# Altium PCB DM6010_R2M2E2.PcbDoc
Units mm, origin at the board's own origin, x right, y up, seen from the top; angles counter-clockwise.
Board outline 23 x 10.05 mm, 4 copper layers (Layer 1, Layer 2, Layer 3, Layer 4), stack 0.972 mm thick; 12 components, 21 nets, 116 pads, 60 vias.
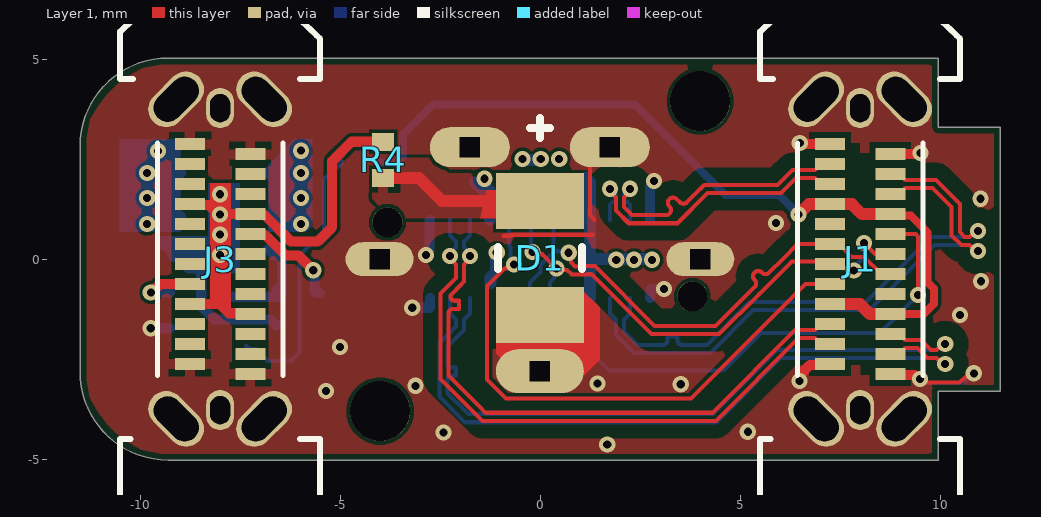
[diagram p0: Layer 1 view]
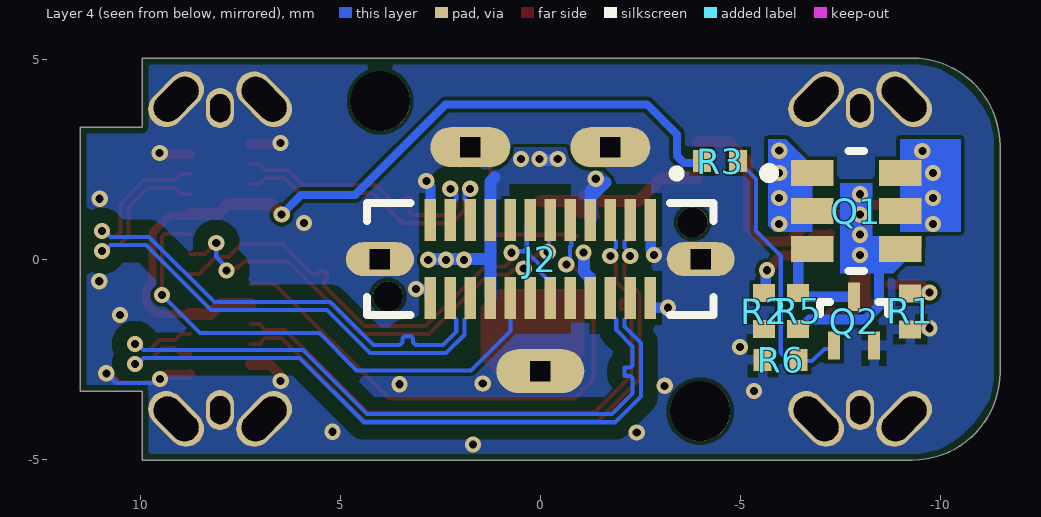
[diagram p1: Layer 4 view, seen from below]
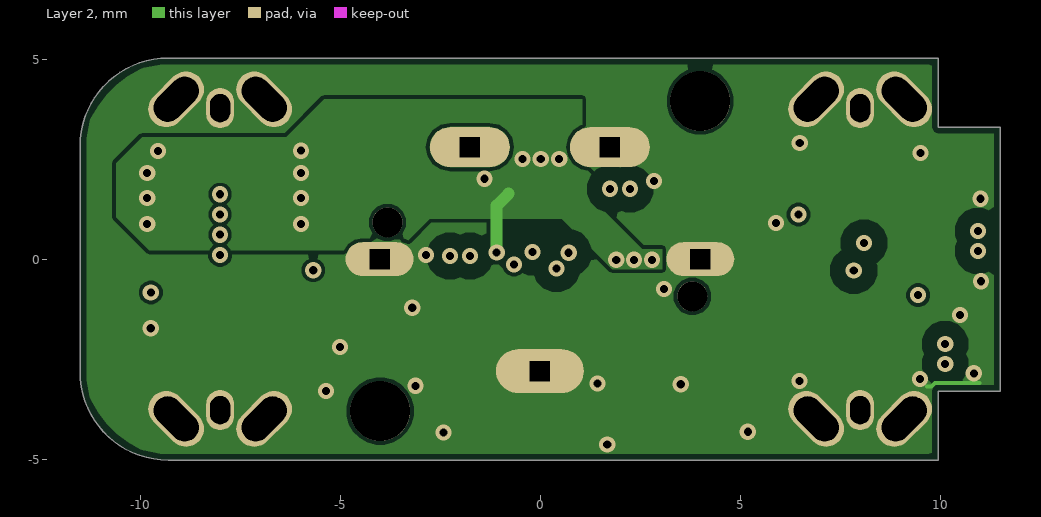
[diagram p2: Layer 2]
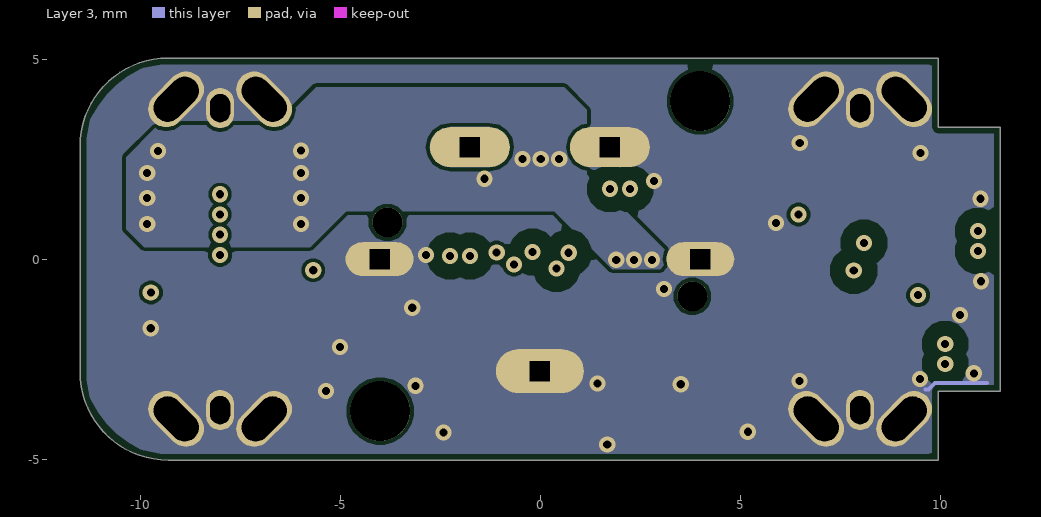
[diagram p3: Layer 3]
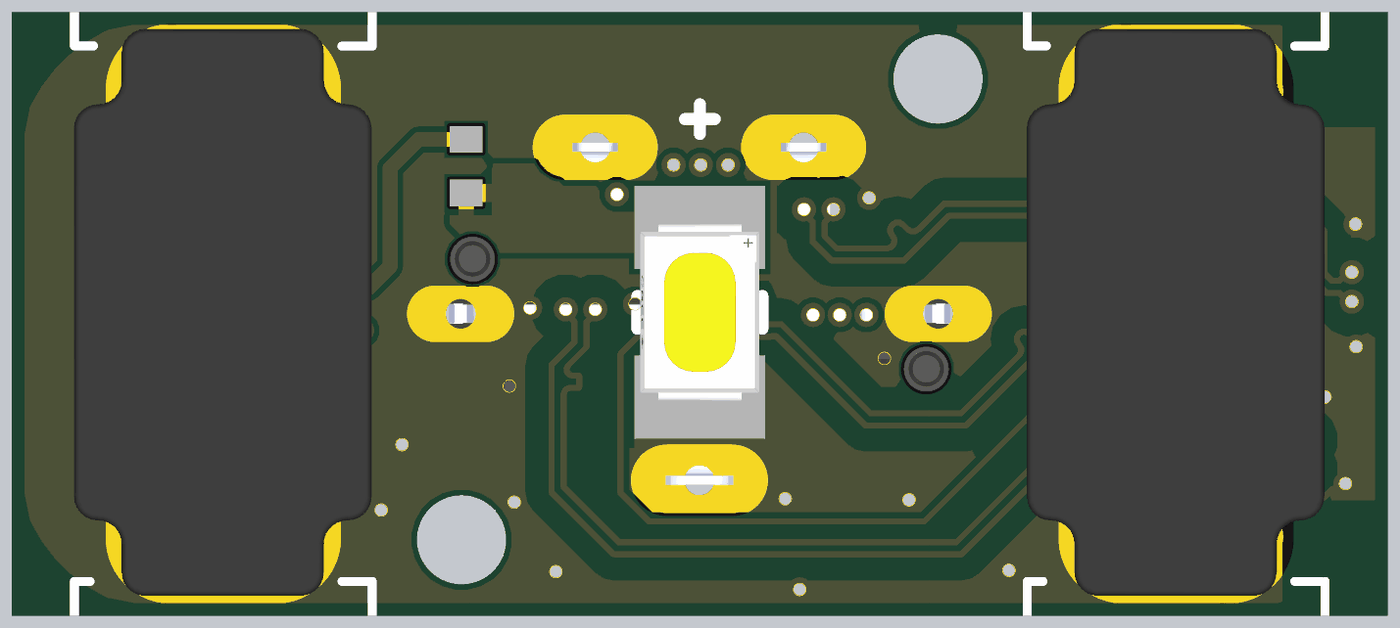
[diagram p4: 3D render of the assembled board from above, using the file's embedded part models]

## Layer stack, top to bottom
Top Solder Mask: solder mask 0.0178, Solder Resist, Dk 3.5
Layer 1: signal copper 0.0356
Dielectric 1: prepreg 0.0711, PP-006, Dk 4
Layer 2: signal copper 0.0279
Dielectric 2: core 0.71, Core-038, Dk 4.3
Layer 3: signal copper 0.0203
Dielectric 3: prepreg 0.0711, PP-006, Dk 4
Layer 4: signal copper 0.0356
Bottom Solder Mask: solder mask 0.0178, Solder Resist, Dk 3.5

## Board outline
-11.5,-2.825 ccw(c-9.3,-2.825) -9.3,-5.025 8.803,-5.025 9.95,-5.025 9.95,-3.3 11.5,-3.3 11.5,3.3 9.95,3.3 9.95,5.025 -9.3,5.025 ccw(c-9.3,2.825) -11.5,2.825

## Design rules (kind name [scope] priority, off if disabled: settings)
AcuteAngle [All] p1: minimum=1.50000000000000E+0001 checktracksonly=TRUE
AssemblyTestPointUsage [All] p1: valid=2
BoardOutlineClearance [not InNet('GND')] p1: gap=0.254 ignorepadtopadclearanceinfootprint=FALSE except(0: Text-OutlineEdge Text-CavityEdge Text-CutoutEdge Text-SplitBarrior Text-SplitContinuation)
BoardOutlineClearance BoardOutlineClearance_GND [All] p2: gap=0.15 ignorepadtopadclearanceinfootprint=FALSE
Clearance diff_pair_gnd [InPolygon vs InAnyDifferentialPair] p1: gap=0.381 ignorepadtopadclearanceinfootprint=FALSE
Clearance [All] p2: gap=0.089 ignorepadtopadclearanceinfootprint=FALSE
Clearance Clearance_default [All] p3: gap=0.102 ignorepadtopadclearanceinfootprint=FALSE
ComponentClearance "BGA Decoupling Clearance" [IsComponent AND OnBottomLayer AND WithinRoom('BGA Decoupling') vs IsComponent AND OnBottomLayer AND WithinRoom('BGA Decoupling')] p1: gap=0 collisioncheckmode=3 verticalgap=0 showdistances=FALSE
ComponentClearance [All] p2: gap=0 collisioncheckmode=3 verticalgap=0 showdistances=TRUE
ComponentOrientations [All] p1: allowedrotations=32
DiffPairsRouting USB [InDifferentialPairClass('USB3')] p1: maxlimit=0.254 minlimit=0.102 mostfreqgap=0.254 toplayer_maxgap=0.127 toplayer_prefgap=0.127 toplayer_minwidth=0.099 toplayer_maxwidth=0.102 toplayer_prefwidth=0.102 bottomlayer_maxgap=0.127 bottomlayer_prefgap=0.127 bottomlayer_minwidth=0.099 bottomlayer_maxwidth=0.102 bottomlayer_prefwidth=0.102 impedanceprofiledriven=TRUE impedanceprofileid={297CAB22-67D0-4EEE-AAEA-9CF56FDF7430} impedanceprofilevalue=90.000000 maxuncoupledlength=12.7
FabricationTestPointUsage [All] p1: valid=2 allowmultiple=FALSE
HoleSize [All] p1: absolutevalues=TRUE maxlimit=25.4 minlimit=0.102 maxpercent=80.000 minpercent=20.000
HoleToHoleClearance [All] p1: gap=0.076 allowstackedmicrovias=TRUE
MatchedLengths "Schematic Matched Net Lengths" [InNetClass('USB')] p1: tolerance=25.4 checknetsindiffpair=TRUE checkdiffpairvsdiffpair=FALSE checkxsignals=FALSE checkothers=FALSE usedelayunits=TRUE delaytolerance=0.500000
MatchedLengths DifferentialPairs [All] p2: tolerance=0.127 checknetsindiffpair=TRUE checkdiffpairvsdiffpair=FALSE checkxsignals=FALSE checkothers=FALSE usedelayunits=TRUE delaytolerance=0.500000
MinimumAnnularRing [All] p1: minimumring=0.076
MinimumSolderMaskSliver [All] p1: minsoldermaskwidth=0.01
NetAntennae [All] p1: netantennaetolerance=0.025
PlaneConnect [All] p1: pad.planeconnectstyle=Relief pad.reliefexpansion=0.508 pad.reliefentries=4 pad.reliefconductorwidth=0.254 pad.reliefairgap=0.254 via.planeconnectstyle=Direct via.reliefexpansion=0.508 via.reliefentries=4 via.reliefconductorwidth=0.254 via.reliefairgap=0.254
PolygonConnect Outer_Layer_PWR [InNetClass('Power_trace')] p1: connectstyle=Direct reliefconductorwidth=0.254 reliefentries=4 polygonreliefangle="90 Angle" airgapwidth=0.254
PolygonConnect GenericPoly [All] p2: thpad.connectstyle=Direct thpad.reliefconductorwidth=0.254 thpad.reliefentries=4 thpad.polygonreliefangle="90 Angle" thpad.airgapwidth=0.254 smdpad.connectstyle=Relief smdpad.reliefconductorwidth=0.254 smdpad.reliefentries=4 smdpad.polygonreliefangle="90 Angle" smdpad.airgapwidth=0.154 via.connectstyle=Direct via.reliefconductorwidth=0.254 via.reliefentries=4 via.polygonreliefangle="90 Angle" via.airgapwidth=0.254
RoutingPriority [InNet('No Net')] p1: routingpriority=0
RoutingVias DiffVias [InDrillLayerPair('Layer 1 - Layer 4')] p1: holewidth=0.711 width=1.27 viastyle="Through Hole" minholewidth=0.711 minwidth=1.27 maxholewidth=0.711 maxwidth=1.27 useviatemplates=TRUE viatemplateguid#1={2571D4BA-F4FB-481A-A40A-0C23688472B6} viatemplatename#1=v41h20m0mx0
RoutingVias DrilledVias [InDrillLayerPair('Layer 1 - Layer 6') OR InDrillLayerPair('Layer 3 - Layer 4')] p2: holewidth=0.203 width=0.406 viastyle="Through Hole" minholewidth=0.203 minwidth=0.406 maxholewidth=25.4 maxwidth=25.4 useviatemplates=TRUE viatemplateguid#1={2571D4BA-F4FB-481A-A40A-0C23688472B6} viatemplatename#1=v41h20m0mx0
SMDToCorner [All] p1: distance=0
SMDToPlane [All] p1: distance=0
SilkToSilkClearance [All] p1: silktosilkclearance=-0.254
SilkToSolderMaskClearance [IsPad] p1: minsilkscreentomaskgap=-5 clearancetoexposedcopper=TRUE
SolderMaskExpansion [All] p1: expansion=0.051 istentingtop=FALSE
UnRoutedNet [All] p1: checkbadconnections=TRUE
ViasUnderSMD [All] p1: allowed=TRUE
Width Width_default [Not IsDifferentialPair] p1: maxlimit=1.27 minlimit=0.102 preferedwidth=0.102
17 further rules are at their usual default settings.

## Classes and differential pairs
net class Power_trace: VBUSOUT VBUSPWR
net class USB: RXB_N RXB_P RXC_N RXC_P TXB_N TXB_P TXC_N TXC_P USB_D_N USB_D_P
differential pair class USB3: RXB RXC TXB TXC USB_D
differential pair USB_D: +USB_D_P -USB_D_N
differential pair TXC: +TXC_P -TXC_N
differential pair TXB: +TXB_P -TXB_N
differential pair RXC: +RXC_P -RXC_N
differential pair RXB: +RXB_P -RXB_N

## Components (designator, comment, footprint, x,y, rotation, side; value= is the part's Value field where it differs from the comment)
D1 "CLM3C-RKW-CUBVAAA3" CLM3C-RKW-CUBVAAA3 0.002,0.025 r270 top
J1 "USB3.1 TYPEC 24P SMD Vertical" CX80B1-24P 8,0 r90 top locked
J2 "USB4151-GF-C" GCT_USB4151-GF-C_REVA -0.005,0 r180 bottom
J3 "USB3.1 TYPEC 24P SMD Vertical" CX80B1-24P -8,0 r90 top
Q1 "IRLTS2242TRPBF" TSOP-6-MFG -7.9,1.2 r180 bottom
Q2 "RE1C002UNTCL" RE1C002UNTCL -7.85,-1.55 r180 bottom
R1 "5.11K 0402" RESC0402(1005)_L -9.252,-1.304 r90 bottom
R2 "5.11K 0402" RESC0402(1005)_L -5.6,-1.3 r90 bottom
R3 "1K 0402" RESC0402(1005)_L -4.5,2.45 r180 bottom
R4 "1K 0402" RESC0402(1005)_L -3.923,2.484 r90 top
R5 "100K 0402" RESC0402(1005)_L -6.45,-1.3 r270 bottom
R6 "100K 0402" RESC0402(1005)_L -6.015,-2.52 r180 bottom

## Footprints (in the part's own frame and the unit in brackets; to place one, negate y for a bottom-side part, rotate by r counter-clockwise, add the part's x,y. Pads: shape width x height; smd on the part's side, far side on the other; paste and mask are expansions set on the pad)
CLM3C-RKW-CUBVAAA3 [mm]
  rect 1.4x2.2 smd paste+0 mask+0: 1(-1.425,0) 2(1.425,0)
  silkscreen extent -3.5,-1.05 0.28,1.05, body extent -2.3,-1.2 2.3,1.2, height 0.25
CX80B1-24P [mm] "USB3.1 Type-C Molex SMT, Through Hole, Vertical"
  rect 0.3x0.75 smd: A1(-2.625,0.755) A2(-2.125,0.755) A3(-1.625,0.755) A4(-1.125,0.755) A5(-0.625,0.755) A6(-0.125,0.755) A7(0.375,0.755) A8(0.875,0.755) A9(1.375,0.755) A10(1.875,0.755) A11(2.375,0.755) A12(2.875,0.755) B1(2.625,-0.755) B2(2.125,-0.755) B3(1.625,-0.755) B4(1.125,-0.755) B5(0.625,-0.755) B6(0.125,-0.755) B7(-0.375,-0.755) B8(-0.875,-0.755) B9(-1.375,-0.755) B10(-1.875,-0.755) B11(-2.375,-0.755) B12(-2.875,-0.755)
  oval 1.6x0.9 hole 0.7 slot 1.3 at 45 deg rot 45: SH1(-3.995,1.1) SH4(3.995,-1.1)
  oval 1.6x0.9 hole 0.7 slot 1.3 at 135 deg rot 135: SH2(3.995,1.1) SH3(-3.995,-1.1)
  oval 1x0.7 hole 0.5 slot 0.7 at 0 deg: SH5(-3.775,0) SH6(3.775,0)
  silkscreen extent -6,-2.5 6,2.5, body extent -4.74,-2.49 4.79,2.51, height 7.17
GCT_USB4151-GF-C_REVA [mm]
  rect 0.28x1.05 smd: A1(2.75,0.975) A2(2.25,0.975) A3(1.75,0.975) A4(1.25,0.975) A5(0.75,0.975) A6(0.25,0.975) A7(-0.25,0.975) A8(-0.75,0.975) A9(-1.25,0.975) A10(-1.75,0.975) A11(-2.25,0.975) A12(-2.75,0.975) B1(-2.75,-0.975) B2(-2.25,-0.975) B3(-1.75,-0.975) B4(-1.25,-0.975) B5(-0.75,-0.975) B6(-0.25,-0.975) B7(0.25,-0.975) B8(0.75,-0.975) B9(1.25,-0.975) B10(1.75,-0.975) B11(2.25,-0.975) B12(2.75,-0.975)
  oval 1.7x0.85 hole 0.5 square: S1(-4.01,0) S4(4.01,0)
  oval 2x1 hole 0.5 square: S2(-1.75,2.8) S3(1.75,2.8)
  oval 2.2x1.1 hole 0.5 square: S5(0,-2.8)
  round 0.75 hole 0.75 unplated: ""(-3.81,-0.93) ""(3.81,0.92)
  silkscreen extent -4.33,-1.4 4.33,2.24, body extent -4.33,-2.88 4.33,2.88, height 11.1
RE1C002UNTCL [mm] "ROHM SOT-416FL"
  rect 0.3x0.71 smd: 1(-0.5,-0.61) 2(0.5,-0.61) 3(0,0.61)
  silkscreen extent -0.85,0.18 0.85,0.48, body extent -0.8,-0.8 0.8,0.8, height 0.75
RESC0402(1005)_L [mm] "Chip Resistor, Body 1.0x0.5mm, IPC High Density"
  rect 0.45x0.55 smd: 1(-0.45,0) 2(0.45,0)
  body extent -0.52,-0.27 0.53,0.28, height 0.4
TSOP-6-MFG [mm]
  rect 1.06x0.65 smd: 1(-1.1,0.95) 2(-1.1,0) 3(-1.1,-0.95) 4(1.1,-0.95) 5(1.1,0) 6(1.1,0.95)
  silkscreen extent -2.3,-1.5 0.2,1.5, body extent -1.4,-1.45 1.4,1.45, height 1.45

## Part data
D1: "Single Color LED, Red", Color=Red, Forward Current-Max=50mA, Manufacturer 1=Cree, Max Operating Temperature=100°C, Min Operating Temperature=-40°C, Additional Feature="HIGH RELIABILITY", Category=LEDs, ComponentLink1Description=https://datasheet.ciiva.com:443/pdfs/VipMasterIC/IC/CREE/CREE-S-A0009778054/CREE-S-A0009831191-1.pdf?src-supplier=IHS+Markit, ComponentLink1URL=https://datasheet.ciiva.com:443/pdfs/VipMasterIC/IC/CREE/CREE-S-A0009778054/CREE-S-A0009831191-1.pdf?src-supplier=IHS+Markit, ComponentLink2Description=https://datasheet.ciiva.com/15210/getdatasheetpartid-563038-15210357.pdf?src-supplier=Verical, ComponentLink2URL=https://datasheet.ciiva.com/15210/getdatasheetpartid-563038-15210357.pdf?src-supplier=Verical, ComponentLink3Description=https://datasheet.ciiva.com/2116/clm3crkwakw1156-2116358.pdf?src-supplier=Digi-Key, ComponentLink3URL=https://datasheet.ciiva.com/2116/clm3crkwakw1156-2116358.pdf?src-supplier=Digi-Key, Luminous Intensity-Nom=730mcd, Manufacturer Part Number 1=CLM3C-RKW-CUBVAAA3, Mount="Surface Mount", Number of Functions=1, Number of Pins=2, Optoelectronic Device Type="SINGLE COLOR LED", Overall Height=1.3mm, Packaging="Tape and Reel", Pricing 1="1=0,16910, 10=0,15700, 25=0,15600, 3000=0,11060, 6000=0,10380, 9000=0,10200 (USD)", REACH SVHC="No SVHC", RoHS=Yes, RoHS Compliant=Yes, Shape=Rectangular, Stock 1=46, Supplier 1="Arrow Electronics", Supplier Part Number 1=CLM3C-RKW-CUBVAAA3, Viewing Angle=120°
J1 J3: library part CX80B1-24P, "CONN RCPT USB3.1 TYPEC 24POS SMD Vertical", Case/Package=0101, Current Rating=1.25A, Flammability Rating="UL94 V-0", Insulation Color=Black, Manufacturer 1="Hirose Electric Co Ltd", Max Operating Temperature=80°C, Min Operating Temperature=-30°C, Supplier Part Number 1=26-CX80B1-24PCT-ND, ComponentLink1Description="Product page", ComponentLink1URL=https://www.jae.com/en/connectors/series/detail/product/id=66513, ComponentLink2Description=Digikey, ComponentLink2URL=https://www.digikey.com/en/products/detail/jae-electronics/DX07S024WJ3R400/6594044, Connector Type=USB, Contact Material="Copper Alloy", Contact Plating=Gold, Features=Shielded, Gender=Receptacle, Housing Material=Thermoplastic, Length=8.94mm, Manufacturer Part Number 1=CX80B1-24P, Mating Cycles=10000, Mount="Surface Mount,Through Hole,Vertical", Number of Contacts=24, Number of Pins=24, Number of Ports=1, Number of Terminals=24, Orientation=Vertical, Packaging="Tape and Reel", Pitch=0.5mm, Pricing 1="1=2.15000, 10=1.94900, 25=1.82960, 50=1.75000, 100=1.67050, 250=1.51140, 500=1.39208 (USD)", REACH SVHC=Unknown, RoHS=Yes, Shielding=Shielded, Stock 1=939, Supplier 1=Digi-Key, Termination=Solder, USB Standard="USB 3.1"
J2: "USB Connector, 24 Contact(s), Male, Straight, Surface Mount Terminal, Locking, Plug", Manufacturer 1="Global Connector Technology", Supplier Part Number 1=86AH2023, Manufacturer Part Number 1=USB4151-GF-C, Pricing 1="1=1,89000, 10=1,74000, 25=1,62000, 50=1,50000, 100=1,35000, 250=1,20000 (USD)", RoHS=Yes, Stock 1=1006, Supplier 1=Newark
Q1: "MOSFET P-CH 20V 6.9A 6TSOP", Case/Package=TSOP, Continuous Drain Current (ID)=6.9A, Drain to Source Voltage (Vdss)=-20V, Gate to Source Voltage (Vgs)=12V, Input Capacitance=905pF, Manufacturer 1=Infineon, Max Operating Temperature=150°C, Max Power Dissipation=2W, Min Operating Temperature=-55°C, Threshold Voltage=-400mV, Contact Plating=Tin, Halogen Free="Halogen Free", Lead Free="Lead Free", Manufacturer Part Number 1=IRLTS2242TRPBF, Max Dual Supply Voltage=-20V, Mount="Surface Mount", Number of Pins=6, Packaging="Tape and Reel", Rds On Max=32mR, REACH SVHC="No SVHC", Rise Time=18ns, RoHS Compliant=Yes
Q2: "VISHAY - SI1062X-T1-GE3 - MOSFET Transistor, N Channel, 530 mA, 20 V, 0.35 ohm, 4.5 V, 1 V", Case/Package=SOT-89, Continuous Drain Current (ID)=200mA, Drain to Source Breakdown Voltage=20V, Drain to Source Resistance=350mR, Drain-source On Resistance-Max=420mR, Gate to Source Voltage (Vgs)=8V, Input Capacitance=25pF, Manufacturer 1=Rohm, Manufacturer 2="Vishay Siliconix", Manufacturer Part Number 2=SI1062X-T1-GE3, Max Operating Temperature=150°C, Max Power Dissipation=150mW, Min Operating Temperature=-55°C, Package Quantity=3000, Power Dissipation=220mW, Supplier Part Number 1=RE1C002UNTCLCT-ND, Threshold Voltage=1V, Category=MOSFETs, ComponentLink1Description=http://www.mouser.com/ds/2/348/re1c002untcl-e-1018231.pdf?src-supplier=Mouser, ComponentLink1URL=http://www.mouser.com/ds/2/348/re1c002untcl-e-1018231.pdf?src-supplier=Mouser, ComponentLink2Description=http://rohmfs.rohm.com/en/techdata_basic/transistor/taping/EMT3_TL_taping.pdf?src-supplier=Digi-Key, ComponentLink2URL=http://rohmfs.rohm.com/en/techdata_basic/transistor/taping/EMT3_TL_taping.pdf?src-supplier=Digi-Key, ComponentLink3Description=http://rohmfs.rohm.com/en/products/databook/datasheet/discrete/transistor/mosfet/re1c002un.pdf?src-supplier=Avnet, ComponentLink3URL=http://rohmfs.rohm.com/en/products/databook/datasheet/discrete/transistor/mosfet/re1c002un.pdf?src-supplier=Avnet, ComponentLink4Description=https://www.rohm.com/datasheet/RE1C002UN/re1c002untcl-e?src-supplier=Digi-Key, ComponentLink4URL=https://www.rohm.com/datasheet/RE1C002UN/re1c002untcl-e?src-supplier=Digi-Key, ComponentLink5Description=http://www.farnell.com/datasheets/2704376.pdf?src-supplier=Newark, ComponentLink5URL=http://www.farnell.com/datasheets/2704376.pdf?src-supplier=Newark, ComponentLink6Description=http://www.farnell.com/datasheets/2704376.pdf?src-supplier=Farnell, ComponentLink6URL=http://www.farnell.com/datasheets/2704376.pdf?src-supplier=Farnell, ComponentLink7Description=http://www.farnell.com/datasheets/2704376.pdf?src-supplier=Element14, ComponentLink7URL=http://www.farnell.com/datasheets/2704376.pdf?src-supplier=Element14, ComponentLink8Description=https://datasheet.ciiva.com/6376/si1062x-6376310.pdf?src-supplier=Digi-Key, ComponentLink8URL=https://datasheet.ciiva.com/6376/si1062x-6376310.pdf?src-supplier=Digi-Key, ComponentLink9Description=https://datasheet.ciiva.com/24011/si1062x-256537-24011195.pdf?src-supplier=Mouser, ComponentLink9URL=https://datasheet.ciiva.com/24011/si1062x-256537-24011195.pdf?src-supplier=Mouser, ComponentLink10Description=https://datasheet.ciiva.com/6376/si1062x-6376251.pdf?src-supplier=Digi-Key, ComponentLink10URL=https://datasheet.ciiva.com/6376/si1062x-6376251.pdf?src-supplier=Digi-Key, Drain to Source Voltage (Vdss)=20V, Element Configuration=Single, Fall Time=11ns, Lead Free="Lead Free", Manufacturer Part Number 1=RE1C002UNTCL, Mount="Surface Mount", Number of Channels=1, Number of Elements=1, Number of Pins=3, On-State Resistance=420mR, Packaging="Tape and Reel", Polarity=N-CHANNEL, Pricing 1="1=0.20000, 10=0.18200, 100=0.09930, 500=0.06112, 1000=0.04167 (USD)", Pricing 2="1=0,47000, 10=0,33100, 25=0,30800, 100=0,16720, 500=0,13640, 1000=0,10120 (USD)", Rds On Max=1.2R, REACH SVHC="No SVHC", Rise Time=14ns, RoHS=Yes, RoHS Compliant=Yes, Series=TrenchFET®, Stock 1=868886, Stock 2=28076, Supplier 1=Digi-Key, Supplier 2=Digi-Key, Supplier 3=Digi-Key, Supplier Part Number 2=SI1062X-T1-GE3CT-ND, Supplier Part Number 3=SI1062X-T1-GE3TR-ND, Turn-Off Delay Time=16ns, Turn-On Delay Time=2ns, Weight=0.001058oz
R1 R2: library part RC0402FR-075K11L, "RES SMD 5.11K OHM 1% 1/16W 0402 5.11 kOhms ±1% 0.063W, 1/16W Chip Resistor 0402 (1005 Metric) Moisture Resistant Thick Film", Case Code (Imperial)=0402, Case Code (Metric)=1005, Manufacturer 1=Yageo, Max Operating Temperature=155°C, Max Power Dissipation=63mW, Min Operating Temperature=-55°C, Package Quantity=1, Power Rating=62.5mW, Resistance=5.11kR, Supplier Part Number 1=311-5.11KLRCT-ND, Temperature Coefficient=100ppm/°C, Tolerance=1%, Voltage Rating=50V, Case/Package=0402, ComponentLink1Description=https://datasheet.ciiva.com/2518/pyu-r-int-thick-7-2518982.pdf?src-supplier=Digi-Key, ComponentLink1URL=https://datasheet.ciiva.com/2518/pyu-r-int-thick-7-2518982.pdf?src-supplier=Digi-Key, ComponentLink2Description=https://datasheet.ciiva.com/2518/pyu-r-int-thick-7-2518983.pdf?src-supplier=Digi-Key, ComponentLink2URL=https://datasheet.ciiva.com/2518/pyu-r-int-thick-7-2518983.pdf?src-supplier=Digi-Key, ComponentLink3Description=https://datasheet.ciiva.com/5684/1018594-5684622.pdf?src-supplier=Farnell, ComponentLink3URL=https://datasheet.ciiva.com/5684/1018594-5684622.pdf?src-supplier=Farnell, ComponentLink4Description=https://datasheet.ciiva.com/16743/pyu-rc0402-51-rohs-l-6-r-16743871.pdf?src-supplier=Future+Electronics, ComponentLink4URL=https://datasheet.ciiva.com/16743/pyu-rc0402-51-rohs-l-6-r-16743871.pdf?src-supplier=Future+Electronics, Composition="Thick Film", Depth=0.5mm, Features="Moisture Resistant", Height=0.016inch, Lead Free="Lead Free", Length=1mm, Manufacturer Part Number 1=RC0402FR-075K11L, Military Standard=Not, Number of Terminations=2, Packaging="Tape and Reel", Pricing 1="1=0.10000, 10=0.01600, 100=0.00670, 1000=0.00301, 2500=0.00261, 5000=0.00215 (USD)", RoHS=Yes, Stock 1=1263456, Supplier 1=Digi-Key, Termination=SMD/SMT, Voltage Rating (DC)=50V, Width=0.02inch, Working Voltage=50V
R3 R4: library part RC0402FR-071KL, "RES SMD 1K OHM 1% 1/16W 0402 1 kOhms ±1% 0.063W, 1/16W Chip Resistor 0402 (1005 Metric) Moisture Resistant Thick Film", Case Code (Imperial)=0402, Case Code (Metric)=1005, Manufacturer 1=Yageo, Max Operating Temperature=155°C, Min Operating Temperature=-55°C, Power Rating=62.5mW, Resistance=1kR, Supplier Part Number 1=311-1.00KLRCT-ND, Temperature Coefficient=100ppm/°C, Tolerance=1%, Voltage Rating=50V, Case/Package=0402, ComponentLink1Description=https://datasheet.ciiva.com/11819/0900766b80c66297-11819477.pdf?src-supplier=RSComponents, ComponentLink1URL=https://datasheet.ciiva.com/11819/0900766b80c66297-11819477.pdf?src-supplier=RSComponents, ComponentLink2Description=https://datasheet.ciiva.com/12666/pyu-rc0402-51-rohs-l-6-r-12666741.pdf?src-supplier=Mouser, ComponentLink2URL=https://datasheet.ciiva.com/12666/pyu-rc0402-51-rohs-l-6-r-12666741.pdf?src-supplier=Mouser, ComponentLink3Description=https://datasheet.ciiva.com/17063/pyu-rc0402-51-rohs-l-6-r-17063193.pdf?src-supplier=Future+Electronics, ComponentLink3URL=https://datasheet.ciiva.com/17063/pyu-rc0402-51-rohs-l-6-r-17063193.pdf?src-supplier=Future+Electronics, ComponentLink4Description=https://datasheet.ciiva.com/22747/1018594-22747513.pdf?src-supplier=Element14, ComponentLink4URL=https://datasheet.ciiva.com/22747/1018594-22747513.pdf?src-supplier=Element14, ComponentLink5Description=https://datasheet.ciiva.com/7849/1018594-7849869.pdf?src-supplier=Element14, ComponentLink5URL=https://datasheet.ciiva.com/7849/1018594-7849869.pdf?src-supplier=Element14, ComponentLink6Description=https://datasheet.ciiva.com/7983/1018594-7983502.pdf?src-supplier=Element14, ComponentLink6URL=https://datasheet.ciiva.com/7983/1018594-7983502.pdf?src-supplier=Element14, ComponentLink7Description=https://datasheet.ciiva.com/7849/1018594-7849871.pdf?src-supplier=Element14, ComponentLink7URL=https://datasheet.ciiva.com/7849/1018594-7849871.pdf?src-supplier=Element14, Composition="Thick Film", Depth=0.5mm, Height=0.32mm, Lead Free="Lead Free", Length=1mm, Manufacturer Part Number 1=RC0402FR-071KL, Military Standard=Not, Number of Pins=2, Packaging="Tape and Reel", Pricing 1="1=0.10000, 10=0.01600, 100=0.00670, 1000=0.00301, 2500=0.00261, 5000=0.00215 (USD)", REACH SVHC=Unknown, RoHS=Yes, Stock 1=60695854, Supplier 1=Digi-Key, Termination=SMD/SMT, Voltage Rating (DC)=50V, Width=0.5mm
R5 R6: library part RC0402FR-07100KL, "RES SMD 100K OHM 1% 1/16W 0402", Case Code (Imperial)=0402, Case Code (Metric)=1005, Manufacturer 1=Yageo, Max Operating Temperature=155°C, Max Power Dissipation=63mW, Min Operating Temperature=-55°C, Package Quantity=1, Resistance=100kR, Supplier Part Number 1=311-100KLRCT-ND, Temperature Coefficient=100ppm/°C, Tolerance=1%, Voltage Rating=50V, Case/Package=0402, ComponentLink1Description=https://datasheet.ciiva.com/11819/0900766b80c66297-11819452.pdf?src-supplier=RSComponents, ComponentLink1URL=https://datasheet.ciiva.com/11819/0900766b80c66297-11819452.pdf?src-supplier=RSComponents, ComponentLink2Description=https://datasheet.ciiva.com/2453/pyu-r-int-thick-7-2453361.pdf?src-supplier=Digi-Key, ComponentLink2URL=https://datasheet.ciiva.com/2453/pyu-r-int-thick-7-2453361.pdf?src-supplier=Digi-Key, ComponentLink3Description=https://datasheet.ciiva.com/2453/pyu-r-int-thick-7-2453362.pdf?src-supplier=Digi-Key, ComponentLink3URL=https://datasheet.ciiva.com/2453/pyu-r-int-thick-7-2453362.pdf?src-supplier=Digi-Key, ComponentLink4Description=https://datasheet.ciiva.com/2453/pyu-r-int-thick-7-2453363.pdf?src-supplier=Digi-Key, ComponentLink4URL=https://datasheet.ciiva.com/2453/pyu-r-int-thick-7-2453363.pdf?src-supplier=Digi-Key, ComponentLink5Description=https://datasheet.ciiva.com/22747/1018594-22747509.pdf?src-supplier=Element14, ComponentLink5URL=https://datasheet.ciiva.com/22747/1018594-22747509.pdf?src-supplier=Element14, ComponentLink6Description=https://datasheet.ciiva.com/15189/getdatasheetpartid-323696-15189334.pdf?src-supplier=Verical, ComponentLink6URL=https://datasheet.ciiva.com/15189/getdatasheetpartid-323696-15189334.pdf?src-supplier=Verical, ComponentLink7Description=https://datasheet.ciiva.com/12667/pyu-rc0402-51-rohs-l-6-r-12667930.pdf?src-supplier=Mouser, ComponentLink7URL=https://datasheet.ciiva.com/12667/pyu-rc0402-51-rohs-l-6-r-12667930.pdf?src-supplier=Mouser, Composition="Thick Film", Depth=0.5mm, Features="Moisture Resistant", Height=0.016inch, Lead Free="Lead Free", Length=0.039inch, Manufacturer Part Number 1=RC0402FR-07100KL, Military Standard=Not, Number of Terminations=2, Packaging="Tape and Reel", Power Rating=63mW, Pricing 1="1=0.10000, 10=0.01500, 100=0.00600, 1000=0.00270, 2500=0.00235, 5000=0.00194 (USD)", REACH SVHC="No SVHC", RoHS=Yes, Stock 1=50867324, Supplier 1=Digi-Key, Supplier 2=Newark, Supplier 3=Mouser, Supplier Part Number 2=67R9887, Supplier Part Number 3=603-RC0402FR-07100KL, Termination=SMD/SMT, Width=0.02inch, Working Voltage=50V

## Free pads (board coordinates)
  round 1.5 hole 1.5 unplated paste-2 mask-2: A(-4,-3.8) A(4,3.95)

## Via types
v1: diameter 0.406, hole 0.203, Layer 1 to Layer 4, tented both sides, 60 vias

## Nets (pads, with @x,y where several pads share a name; then routed paths per layer and width w, separated by ;. In a path a pad name is that pad's centre, name@x,y a point inside that pad or via, vN(x,y) a via of type N, cw(c..) or ccw(c..) an arc to the next point about the centre after c; other vN are vias at no path point)
CC1: J1.A5 J2.A5 | length 14.4
  Layer 1 w0.102: v1(-0.655,-0.136) -0.737,-0.136 -0.83,-0.229 -0.862,-0.229 -0.867,-0.234 -0.889,-0.234 -1.332,-0.677 -1.332,-3.014 -0.856,-3.49 3.772,-3.49 6.637,-0.625 J1.A5
  Layer 4 w0.102: J2.A5 -0.778,0.952 -0.778,0.343 -0.744,0.309 -0.744,0.035 -0.655,-0.054 v1(-0.655,-0.136)
CC2: J1.B5 J2.B5 | length 12.9
  Layer 1 w0.102: J1.B5 9.39,0.625 9.45,0.565 v1(9.45,-0.9)
  Layer 4 w0.102: J2.B5 0.745,-1.8 1.727,-2.782 4.585,-2.782 5.517,-1.85 8.5,-1.85 v1(9.45,-0.9)
GND: D1.2 J1.A1 J1.A12 J1.B1 J1.B12 J1.SH1 J1.SH2 J1.SH3 J1.SH4 J1.SH5 J1.SH6 J2.A1 J2.A12 J2.B1 J2.B12 J2.S1 J2.S2 J2.S3 J2.S4 J2.S5 J3.A1 J3.A12 J3.B1 J3.B12 J3.SH1 J3.SH2 J3.SH3 J3.SH4 J3.SH5 J3.SH6 Q2.2 R1.1 R2.1 R6.1 | length 17.3
  Layer 1 w0.102: -0.918,0.584 -0.727,0.584 -0.7,0.61 1.316,0.61 ; 1.36,0.984 1.242,1.103 1.242,2.385 1.657,2.8 J2.S2 ; v1(9.5,-3) 9.582,-3 9.671,-3.088 10.488,-3.088 10.633,-2.944 10.673,-2.944 10.762,-2.856 v1(10.844,-2.856)
  Layer 1 w0.254: v1(6.487,-3.047) 6.516,-3.018 6.516,-2.875 6.743,-2.648 7.222,-2.648 J1.A1 ; v1(6.489,2.906) 6.531,2.906 6.562,2.875 J1.A12 ; J1.B12 8.778,-2.897 9.356,-2.897 9.459,-3 v1(9.5,-3) ; J1.B1 9.439,2.625 9.47,2.656 v1(9.511,2.656)
  Layer 2 w0.102: 9.671,-3.181 9.785,-3.181 9.867,-3.099 10.982,-3.099
  Layer 3 w0.102: 9.636,-3.255 9.711,-3.255 9.871,-3.095 11.167,-3.095
  Layer 4 w0.102: v1(9.5,-3) 9.582,-3 9.681,-3.099 10.6,-3.099 v1(10.844,-2.856)
  Layer 4 w0.254: v1@-9.735,-1.728 R1.1@-9.25,-1.728 ; v1(-3.197,-1.215) -2.768,-1.215 -2.755,-1.202 J2.B12 ; v1(-2.85,0.1) -2.85,0.141 -2.767,0.224 -2.767,0.963 J2.A1 ; J2.B1 2.758,-0.962 2.758,-0.75 v1(3.1,-0.75) ; J2.A12 2.745,1.809 2.845,1.909 v1(2.845,1.95)
  other v1: 1.679,-4.635 -2.415,-4.337 5.192,-4.315 -5.35,-3.3 -3.114,-3.168 3.516,-3.129 1.436,-3.11 -5,-2.2 -9.735,-1.729 10.5,-1.4 11.022,-0.553 5.9,0.9 11.011,1.509
NetD1_1: D1.1 R4.1 | length 4.2
  Layer 1 w0.3: R4.1 -3.034,2.034 -2.45,1.45 D1.1
NetQ1_3: Q1.3 Q2.3 R5.1 | length 3.2
  Layer 4 w0.254: Q2.3 -6.598,-0.94 -6.59,-0.932 -6.59,-0.752 -6.492,-0.85 R5.1 -6.455,-0.845 -6.455,0.052 -6.653,0.25 Q1.3 Q1.3@-6.641,0.091
NetQ2_1: Q2.1 R3.2 R6.2 | length 6.8
  Layer 4 w0.102: Q2.1 -7.267,-2.243 -7.107,-2.243 -6.8,-2.55 -6.465,-2.55 -6.225,-2.55 -6.015,-2.34 -6.015,0.085 -5.4,0.7 -5.4,2 -5.174,2.226 -5.124,2.226 -4.95,2.4 R3.2
PCC1: J3.A5 R1.2 | length 1.5
  Layer 1 w0.254: v1(-9.732,-0.834) -9.716,-0.834 -9.507,-0.625 -9.423,-0.625 J3.A5
  Layer 4 w0.254: v1(-9.732,-0.834) -9.729,-0.831 -9.253,-0.831 R1.2@-9.25,-0.828
PCC2: J3.B5 R2.2 | length 2.7
  Layer 1 w0.254: J3.B5 -7.222,0.602 -6.876,0.602 -6.367,0.094 -6.044,0.094 v1(-5.672,-0.278)
  Layer 4 w0.254: v1(-5.672,-0.278) -5.643,-0.307 R2.2@-5.643,-0.752 ; R2.2 -5.643,-0.807 R2.2@-5.643,-0.752 ; R2.2@-5.5,-0.85 -5.545,-0.85 R2.2@-5.643,-0.752
RXB_N: J1.B10 J2.B10 | length 17.9
  Layer 1 w0.102: J1.B10 8.98,-1.875 9.129,-2.023 9.521,-2.023 9.769,-2.271 9.914,-2.271 10.06,-2.125 v1(10.125,-2.125)
  Layer 4 w0.102: J2.B10 -1.755,-1.36 -1.904,-1.508 -1.904,-1.774 -2.315,-2.184 -2.315,-2.319 -2.315,-2.611 ccw(c-2.213,-2.611) -2.213,-2.712 -2.119,-2.712 cw(c-2.119,-2.723) -2.108,-2.723 -2.108,-2.906 cw(c-2.119,-2.906) -2.119,-2.916 -2.213,-2.916 ccw(c-2.213,-3.018) -2.315,-3.018 -2.315,-3.272 -2.315,-3.354 -1.843,-3.825 -1.793,-3.875 4.324,-3.875 5.928,-2.271 9.914,-2.271 10.06,-2.125 v1(10.125,-2.125)
RXB_P: J1.B11 J2.B11 | length 17.9
  Layer 1 w0.102: J1.B11 8.98,-2.375 9.129,-2.227 9.437,-2.227 9.684,-2.474 9.914,-2.474 10.06,-2.62 v1(10.125,-2.62)
  Layer 4 w0.102: J2.B11 -2.255,-1.36 -2.107,-1.508 -2.107,-1.689 -2.518,-2.1 -2.518,-3.438 -1.986,-3.969 -1.927,-4.029 -1.877,-4.078 4.408,-4.078 6.012,-2.474 9.914,-2.474 10.06,-2.62 v1(10.125,-2.62)
RXC_N: J1.A10 J2.A10 | length 7.5
  Layer 1 w0.102: v1(1.75,1.757) 1.75,1.691 1.896,1.545 1.896,1.217 2.216,0.897 3.434,0.897 4.187,1.65 6.022,1.65 6.395,2.023 6.872,2.023 7.02,1.875 J1.A10
  Layer 4 w0.102: J2.A10 1.745,1.36 1.893,1.508 1.893,1.649 1.785,1.757 v1(1.75,1.757)
RXC_P: J1.A11 J2.A11 | length 7.5
  Layer 1 w0.102: v1(2.245,1.757) 2.245,1.691 2.099,1.545 2.099,1.301 2.3,1.1 3.013,1.1 3.143,1.1 ccw(c3.143,1.228) 3.234,1.318 3.233,1.319 cw(c3.323,1.41) 3.233,1.5 cw(c3.323,1.41) 3.413,1.5 3.491,1.422 ccw(c3.582,1.512) 3.672,1.422 3.889,1.639 4.103,1.853 5.938,1.853 6.311,2.227 6.872,2.227 7.02,2.375 J1.A11
  Layer 4 w0.102: J2.A11 2.245,1.36 2.096,1.508 2.096,1.621 2.232,1.757 v1(2.245,1.757)
TXB_N: J1.A3 J2.A3 | length 15.4
  Layer 1 w0.102: v1(-1.755,0.075) -1.755,0.009 -1.901,-0.137 -1.901,-0.56 -2.009,-0.669 -2.208,-0.867 ccw(c-2.136,-0.939) -2.136,-1.04 -2.034,-1.04 cw(c-2.034,-1.051) -2.024,-1.051 -2.024,-1.234 cw(c-2.034,-1.234) -2.034,-1.244 -2.184,-1.244 ccw(c-2.184,-1.346) -2.286,-1.346 -2.286,-1.6 -2.286,-2.915 -1.512,-3.689 -1.36,-3.841 4.309,-3.841 6.377,-1.773 6.872,-1.773 7.02,-1.625 J1.A3
  Layer 4 w0.102: v1(-1.755,0.075) -1.755,0.141 -1.901,0.287 -1.901,0.444 -1.755,0.59 J2.A3
TXB_P: J1.A2 J2.A2 | length 15.4
  Layer 1 w0.102: v1(-2.251,0.075) -2.251,0.009 -2.105,-0.137 -2.105,-0.476 -2.489,-0.861 -2.489,-2.999 -1.503,-3.985 -1.444,-4.045 4.393,-4.045 6.461,-1.977 6.872,-1.977 7.02,-2.125 J1.A2
  Layer 4 w0.102: J2.A2 -2.255,0.59 -2.105,0.439 -2.105,0.287 -2.251,0.141 v1(-2.251,0.075)
TXC_N: J1.B3 J2.B3 | length 14.7
  Layer 1 w0.102: J1.B3 8.98,1.625 9.129,1.773 9.814,1.773 10.29,1.298 10.29,0.592 10.531,0.351 10.738,0.351 10.884,0.205 v1(10.95,0.205)
  Layer 4 w0.102: J2.B3 1.745,-1.36 1.893,-1.508 1.893,-1.891 2.348,-2.345 3.845,-2.345 4.255,-2.345 5.323,-1.277 8.23,-1.277 9.858,0.351 10.738,0.351 10.884,0.205 v1(10.95,0.205)
TXC_P: J1.B2 J2.B2 | length 14.7
  Layer 1 w0.102: J1.B2 8.98,2.125 9.129,1.977 9.898,1.977 10.493,1.382 10.493,0.676 10.615,0.554 10.738,0.554 10.884,0.7 v1(10.95,0.7)
  Layer 4 w0.102: J2.B2 2.245,-1.36 2.096,-1.508 2.096,-1.806 2.432,-2.142 2.598,-2.142 3.079,-2.142 ccw(c3.079,-2.041) 3.181,-2.041 3.181,-2.004 cw(c3.258,-2.004) 3.258,-1.928 3.36,-1.928 cw(c3.36,-2.004) 3.436,-2.004 3.436,-2.041 ccw(c3.538,-2.041) 3.538,-2.142 3.845,-2.142 4.17,-2.142 5.239,-1.074 8.146,-1.074 9.774,0.554 10.738,0.554 10.884,0.7 v1(10.95,0.7)
USB_D_N: J1.A7 J1.B7 J2.A7 J2.B7 | length 13
  Layer 1 w0.102: v1(0.713,0.158) 0.771,0.1 0.771,-0.078 0.875,-0.182 1.107,-0.182 1.114,-0.175 1.367,-0.175 2.865,-1.673 4.389,-1.673 5.327,-0.735 5.363,-0.699 ccw(c5.273,-0.609) 5.363,-0.518 5.36,-0.516 cw(c5.451,-0.425) 5.36,-0.335 cw(c5.451,-0.425) 5.541,-0.335 5.544,-0.338 ccw(c5.634,-0.247) 5.724,-0.338 6.068,0.007 6.437,0.375 J1.A7 ; J1.A7 7.47,0.375 7.787,0.058 8.097,0.058 8.53,-0.375 J1.B7
  Layer 4 w0.102: J2.B7 -0.255,-0.59 0.008,-0.327 0.008,-0.15 0.351,0.194 0.393,0.194 ; J2.A7 0.334,0.886 0.334,0.288 0.393,0.228 ; 0.393,0.196 0.674,0.196 v1(0.713,0.158)
USB_D_P: J1.A6 J1.B6 J2.A6 J2.B6 | length 12.9
  Layer 1 w0.102: v1(-0.191,0.178) -0.135,0.123 0.053,0.123 v1(0.409,-0.233) ; v1@0.422,-0.247 0.443,-0.268 0.674,-0.268 0.791,-0.385 1.191,-0.385 1.198,-0.378 1.282,-0.378 2.78,-1.876 4.473,-1.876 5.471,-0.879 6.291,-0.058 7.404,-0.058 7.572,-0.226 7.784,-0.226 v1(7.842,-0.285) ; v1(8.098,0.401) 8.374,0.125 J1.B6
  Layer 4 w0.102: J2.A6 -0.223,0.943 -0.223,0.211 v1(-0.191,0.178) ; J2.B6 0.245,-0.59 0.35,-0.484 0.35,-0.292 v1(0.409,-0.233) ; v1(7.842,-0.285) 7.842,-0.202 7.948,-0.097 7.948,-0.09 8.097,0.059 v1(8.098,0.401) v1(8.098,0.401)
VBUS: J1.A4 J1.A9 J1.B4 J1.B9 R3.1 | length 20.8
  Layer 1 w0.2: J1.B9 9.593,-1.375 9.842,-1.126 9.842,-0.738 9.69,-0.585 9.69,0.666 9.268,1.088 8.793,1.088 J1.B4
  Layer 1 w0.3: v1(6.462,1.117) v1@6.482,1.137 ; v1@6.551,1.207 6.72,1.375 7.794,1.375 8.044,1.125 J1.B4 ; J1.A4 7.996,-1.125 8.246,-1.375 J1.B9
  Layer 4 w0.2: R3.1 -4,2.4 -3.6,2.4 -3.424,2.576 -3.424,3.119 -2.676,3.866 2.364,3.866 4.63,1.6 5.978,1.6 v1(6.462,1.117)
VBUSOUT: J2.A4 J2.A9 J2.B4 J2.B9 Q1.1 Q1.2 Q1.5 Q1.6 | length 16.2
  Layer 2 w0.3: v1@-1.087,0.196 -1.087,1.335 -0.787,1.635
  Layer 4 w0.3: v1(-9.824,0.875) -9.796,0.875 -9.646,1.025 -9.028,1.025 -9.003,1.05 -9.328,1.375 -9.661,1.375 -9.811,1.525 v1(-9.824,1.525) ; v1(-9.824,2.15) Q1.6 v1(-9.555,2.705) ; Q1.1 Q1.1@-6.595,2.15 ; v1(-5.98,2.711) -6,2.691 -6.211,2.691 -6.42,2.482 -6.42,2.325 Q1.1@-6.595,2.15 ; v1(-5.976,0.875) -6.004,0.875 -6.154,1.025 -6.772,1.025 -6.797,1.05 -6.472,1.375 -6.139,1.375 -5.989,1.525 v1(-5.976,1.525) ; v1(-5.976,2.15) Q1.1@-6.595,2.15 ; -1.633,1.92 -1.255,1.542 -1.255,1.704 -1.37,1.818 v1@-1.37,1.944 ; J2.A4 J2.A4@-1.255,1.484 ; J2.B9@-1.245,-0.6 -1.245,-0.462 -1.097,-0.314 -1.097,0.157 v1(-1.087,0.167) ; v1(-0.439,2.504) -0.419,2.483 -0.344,2.483 -0.341,2.481 -0.054,2.481 -0.04,2.495 -0.011,2.495 v1@0.017,2.523 ; 1.144,2.035 1.245,1.934 J2.A9 1.245,0 ; J2.B4 1.245,0 ; v1(1.902,-0.018) 1.883,0 1.245,0 ; v1@1.902,0 v1@2.78,0
  other v1: 2.35,-0.018 2.798,-0.018 -1.39,2.008 0.017,2.504 0.475,2.504
VBUSPWR: J3.A4 J3.A9 J3.B4 J3.B9 Q1.4 R4.2 R5.2 | length 14.9
  Layer 1 w0.254: J3.A9 -8.732,1.352 -8.281,1.352 -8.054,1.125 v1@-8,1.125 ; J3.A4@-8.749,-1.12 -8.021,-1.12 ; v1(-8,1.622) v1@-8,1.125 ; J3.B9 -7.266,-1.353 -7.778,-1.353 -8.023,-1.108 -8.023,-0.423 -8,-0.4 v1(-8,0.106) v1(-8,0.611) v1(-8,1.117) v1@-8,1.125 ; R4.2 -4.716,2.934 -5.2,2.45 -5.2,0.8 -5.563,0.437 -6.225,0.437 -6.891,1.102 -7.222,1.102 J3.B4 v1@-8,1.125
  Layer 4 w0.254: -8.47,-0.075 -8.47,-1.18 -8.139,-1.511 -6.739,-1.511 R5.2@-6.598,-1.652
  Layer 4 w0.381: Q1.4@-9.135,0.115 Q1.4
pads on no net: J1.A8 J1.B8 J2. J2.A8 J2.B8 J3.A2 J3.A3 J3.A6 J3.A7 J3.A8 J3.A10 J3.A11 J3.B2 J3.B3 J3.B6 J3.B7 J3.B8 J3.B10 J3.B11

## Polygon pours and split planes (outlines as drawn)
GND on Layer 3 "¸" (solid, pour order 27): -11.5,-2.323 -11.5,2.32 -11.503,2.32 cw(c-8.803,2.32) -8.803,5.02 -8.798,5.025 8.795,5.025 8.795,5.028 cw(c8.795,2.328) 11.495,2.328 11.5,2.323 11.5,-2.32 11.503,-2.32 cw(c8.803,-2.32) 8.803,-5.02 8.803,-5.025 -8.795,-5.025 -8.795,-5.028 cw(c-8.795,-2.328)
VBUSOUT on Layer 3 "¸" (solid, remove dead copper, pour order 19): 1.165,3.735 0.6,4.3 -5.6,4.3 -6.55,3.35 -9.55,3.35 -10.35,2.55 -10.35,0.75 -9.9,0.3 -5.75,0.3 -4.85,1.2 0.85,1.2 1.165,1.515
VBUSOUT on Layer 3 "¸" (solid, remove dead copper, pour order 25): 1.202,2.15 0.2,2.15 0.05,2 0.05,1.5 1.8,-0.25 3.008,-0.25 3.133,-0.125 3.133,0.218
GND on Layer 2 "¸" (solid, pour order 24): -11.5,-2.323 -11.5,2.32 -11.503,2.32 cw(c-8.803,2.32) -8.803,5.02 -8.798,5.025 8.795,5.025 8.795,5.028 cw(c8.795,2.328) 11.495,2.328 11.5,2.323 11.5,-2.32 11.503,-2.32 cw(c8.803,-2.32) 8.803,-5.02 8.803,-5.025 -8.795,-5.025 -8.795,-5.028 cw(c-8.795,-2.328)
VBUSOUT on Layer 2 "¸" (solid, pour order 18): 2.55,0.25 1.3,1.5 1.3,2.1 1.05,2.35 1.05,4 -5.4,4 -6.35,3.05 -9.95,3.05 -10.6,2.4 -10.6,1.048 -9.772,0.22 -3.55,0.22 -2.758,1.012 0.538,1.012 1.8,-0.25 3.05,-0.25 3.05,0.25
GND on Layer 1 "¸" (solid, pour order 29): -11.5,-2.323 -11.5,2.32 -11.503,2.32 cw(c-8.803,2.32) -8.803,5.02 -8.798,5.025 8.795,5.025 8.795,5.028 cw(c8.795,2.328) 11.495,2.328 11.5,2.323 11.5,-2.32 11.503,-2.32 cw(c8.803,-2.32) 8.803,-5.02 8.803,-5.025 -8.795,-5.025 -8.795,-5.028 cw(c-8.795,-2.328)
NetD1_1 on Layer 1 "¸" (solid, remove dead copper, pour order 21): -0.814,2.15 -2.297,2.15 -2.675,2.528 -3.929,2.528 -4.198,2.259 -4.198,1.503 -3.718,1.023 -1.371,1.023 -1.098,0.75 -0.814,0.75
GND on Layer 4 "¸" (solid, pour order 28): -11.5,-2.323 -11.5,2.32 -11.503,2.32 cw(c-8.803,2.32) -8.803,5.02 -8.798,5.025 8.795,5.025 8.795,5.028 cw(c8.795,2.328) 11.495,2.328 11.5,2.323 11.5,-2.32 11.503,-2.32 cw(c8.803,-2.32) 8.803,-5.02 8.803,-5.025 -8.795,-5.025 -8.795,-5.028 cw(c-8.795,-2.328)
VBUSOUT on Layer 4 "¸" (solid, remove dead copper, pour order 17): 1.385,1.5 1.385,2.05 0.643,2.792 -0.972,2.792 -1.895,1.869 -1.895,1.5

## Other copper
Layer 1:
  region net NetD1_1: -1.5,1.023 -0.978,1.023 -0.833,1.168 -0.833,1.524 -1.025,1.716 -1.332,1.716
  region net GND: -1.098,-0.751 -1.098,-2.371 -0.436,-3.033 0.977,-3.033 1.489,-2.521 1.489,-1.205 1.034,-0.751 0.275,-0.751
  region net VBUSPWR: -8.25,1.9 -8.25,-1.231 -7.73,-1.231 -7.73,1.9
Layer 4:
  region net VBUSOUT: -5.697,3 -5.697,0.832 -5.849,0.68 -6.8,0.68 -6.8,2.344 -6.144,3
  region net VBUSOUT: -10.512,3 -10.512,0.69 -9,0.69 -9,3
  region net VBUSPWR: -9.53,0.575 -8.3,0.575 -8.3,1.9 -7.508,1.9 -7.508,-0.35 -8.833,-0.35 -9.433,0.25 -9.53,0.25

## Silkscreen, mask and mechanical layers (free items; w line width, h text height)
Board:
  lines w0.1: -11.5,-2.825 ccw(c-9.3,-2.825) -9.3,-5.025 8.803,-5.025 9.95,-5.025 9.95,-3.3 11.5,-3.3 11.5,-2.32 11.5,3.3 9.95,3.3 9.95,5.025 -9.3,5.025 ccw(c-9.3,2.825) -11.5,2.825 -11.5,-2.825